# EAGLE board espcam (EAGLE 9.6.2)
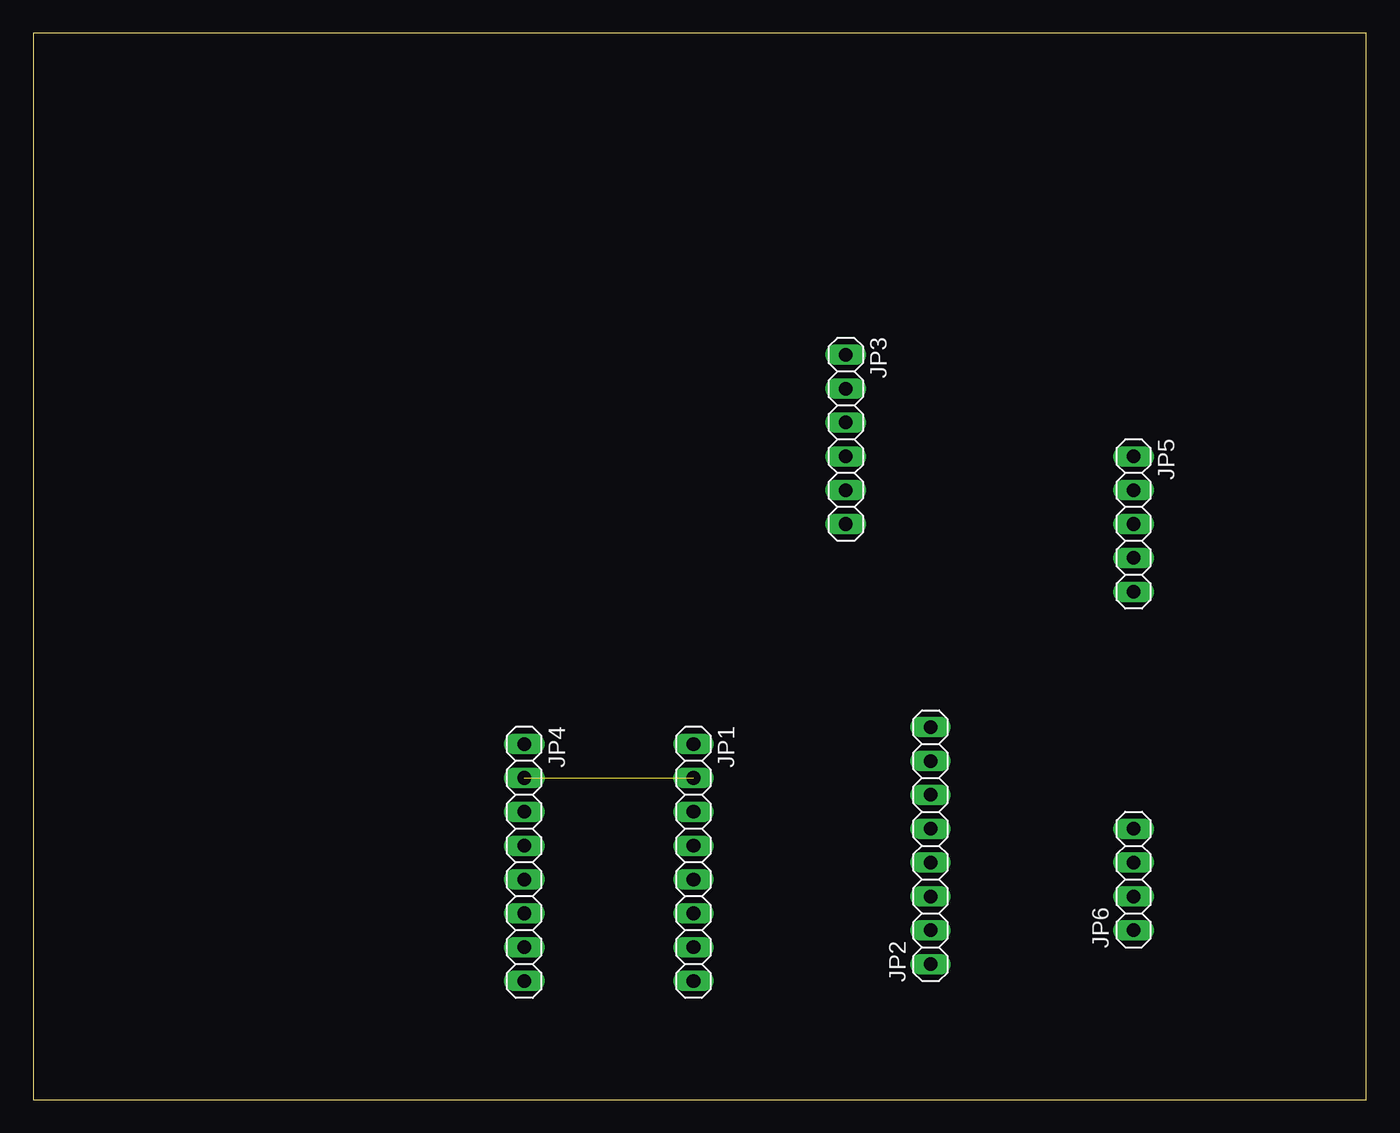
[diagram p0: board, top side]
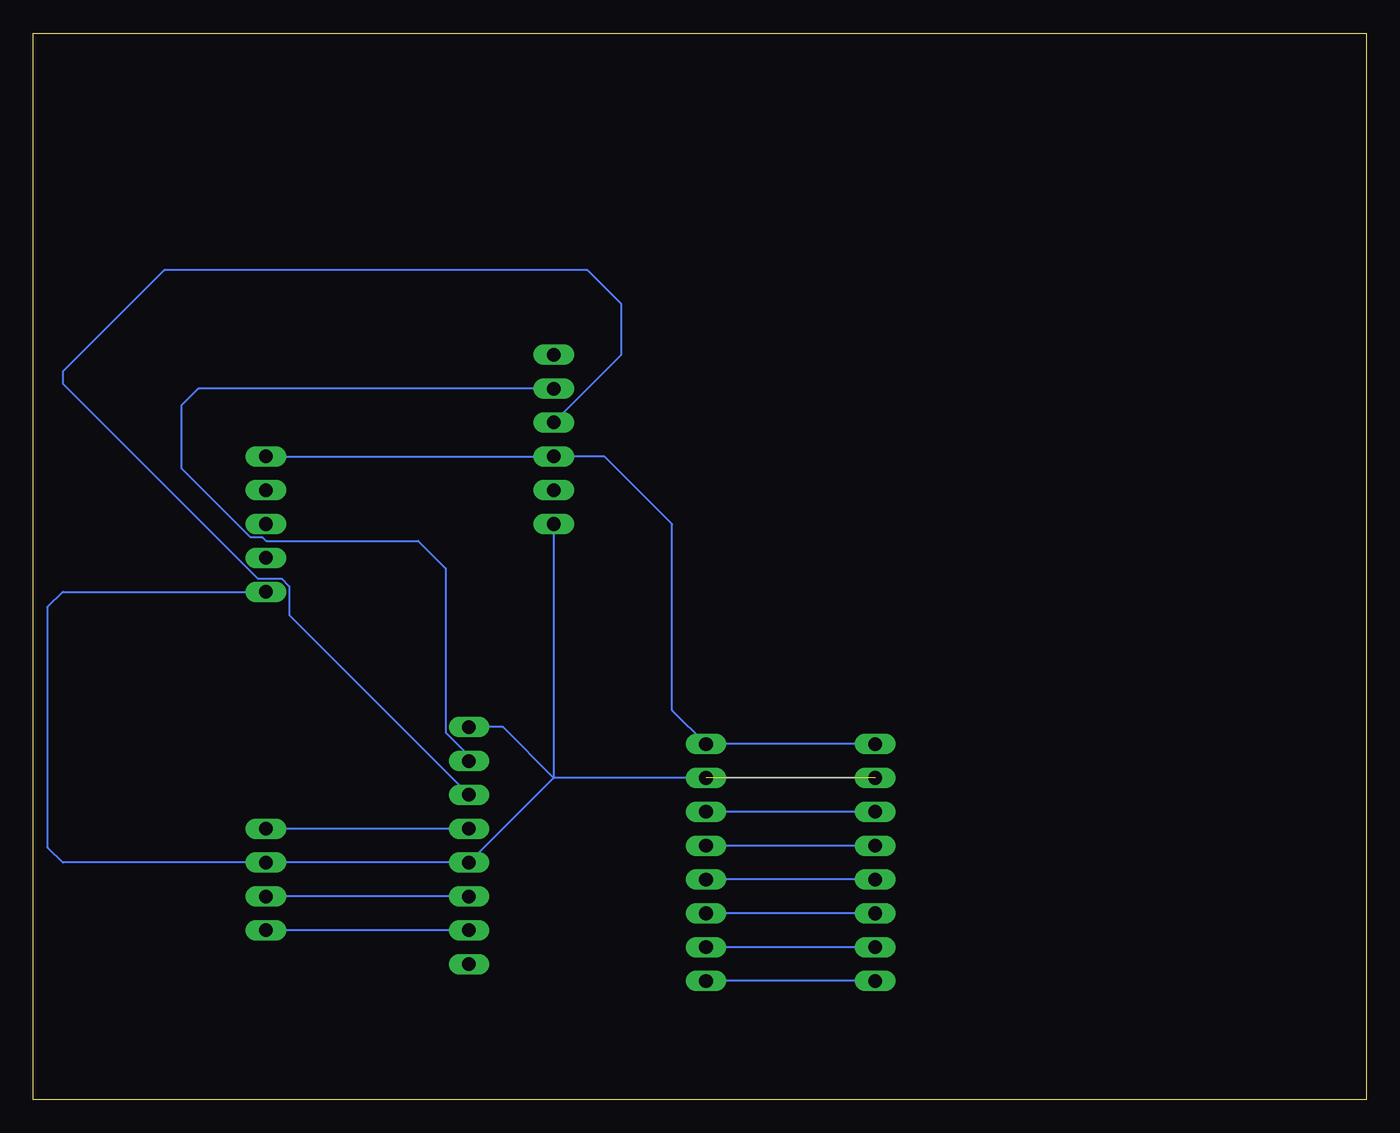
[diagram p1: board, bottom side, seen from below]

Size 100 x 80 mm. Coordinates in mm from the lower left corner, seen from the top.
Outline: 0,0 100,0 100,80 0,80 0,0
Copper layers (1*16): Top 0.035mm / dielectric 1.5mm / Bottom 0.035mm
Design rules "default": minimum track width 6mil, minimum drill 0.35mm, track to track 6mil, track to pad 6mil, pad to pad 6mil, via to via 6mil, smd to smd 6mil, copper to edge 40mil, drill to drill 6mil, minimum pad ring 10mil, minimum via ring 8mil, stop-mask expansion 4mil, vias tented up to drill 0mil, thermal gap 10mil

## Footprints (pad centres in the part's own frame; a part is rotated, then mirrored left to right if it is on the bottom)
1X08 = drill 1.016 long: 1 -8.89,0; 2 -6.35,0; 3 -3.81,0; 4 -1.27,0; 5 1.27,0; 6 3.81,0; 7 6.35,0; 8 8.89,0
1X06 = drill 1.016 long: 1 -6.35,0; 2 -3.81,0; 3 -1.27,0; 4 1.27,0; 5 3.81,0; 6 6.35,0
1X05 = drill 1.016 long: 1 -5.08,0; 2 -2.54,0; 3 0,0; 4 2.54,0; 5 5.08,0
1X04 = drill 1.016 long: 1 -3.81,0; 2 -1.27,0; 3 1.27,0; 4 3.81,0

## Placement (x,y rotation side)
JP1  [1X08]  49.53,17.78 270 top
JP2  [1X08]  67.31,19.05 90 top
JP3  [1X06]  60.96,49.53 270 top
JP4  [1X08]  36.83,17.78 270 top
JP5  [1X05]  82.55,43.18 270 top
JP6  [1X04]  82.55,16.51 90 top

## Library data of the parts
JP1-JP6 = pinhead

## Nets
3V3: JP2.1
5V: JP1.1 JP3.4 JP4.1 JP5.1
GND: JP1.2 JP2.4 JP2.8 JP3.6 JP4.2 JP5.5 JP6.3
IO0: JP2.3 JP6.2
IO2: JP1.7 JP4.7
IO4: JP1.8 JP4.8
IO12: JP1.3 JP4.3
IO13: JP1.4 JP4.4
IO14: JP1.6 JP4.6
IO15: JP1.5 JP4.5
IO16: JP2.2 JP6.1
RX: JP2.7 JP3.2
TX: JP2.6 JP3.3
VOUT: JP2.5 JP6.4

## Tracks (layer width: path | path; a pad name or v marks a point on that pad's centre or on a via)
5V
  Bottom 0.152: JP4.1 JP1.1 52.07,29.21 52.07,43.18 57.15,48.26 JP3.4 JP5.1
GND  (1 unrouted)
  Bottom 0.152: 60.96,24.13 JP2.4 JP6.3 97.79,17.78 98.91,18.9 98.91,36.98 97.79,38.1 JP5.5 | JP4.2 60.96,24.13 | 60.96,24.13 64.77,27.94 JP2.8 | JP3.6 60.96,24.13
IO0
  Bottom 0.152: JP2.3 JP6.2
IO2
  Bottom 0.152: JP4.7 JP1.7
IO4
  Bottom 0.152: JP4.8 JP1.8 50.8,8.89
IO12
  Bottom 0.152: JP4.3 JP1.3
IO13
  Bottom 0.152: JP4.4 JP1.4
IO14
  Bottom 0.152: JP4.6 JP1.6
IO15
  Bottom 0.152: JP4.5 JP1.5
IO16
  Bottom 0.152: JP2.2 JP6.1
RX
  Bottom 0.152: JP3.2 87.63,53.34 88.9,52.07 88.9,47.37 83.72,42.19 82.83,42.19 82.55,41.91 71.12,41.91 69.06,39.85 69.06,27.53 67.31,25.78 JP2.7
TX
  Bottom 0.152: JP3.3 55.88,55.88 55.88,59.69 58.42,62.23 90.17,62.23 97.79,54.61 97.79,53.72 83.16,39.09 81.38,39.09 80.8,38.51 80.8,36.35 JP2.6
VOUT
  Bottom 0.152: JP2.5 JP6.4